# Altium PCB RV901-cnc.PcbDoc
Units mil, origin at the board's own origin, x right, y up, seen from the top; angles counter-clockwise.
Board outline 1795.28 x 2149.61 mil, 2 copper layers (Top Layer, Bottom Layer), stack 63.824 mil thick; 19 components, 84 nets, 151 pads, 0 vias.
Unrouted connection lines stored in the file: 23.
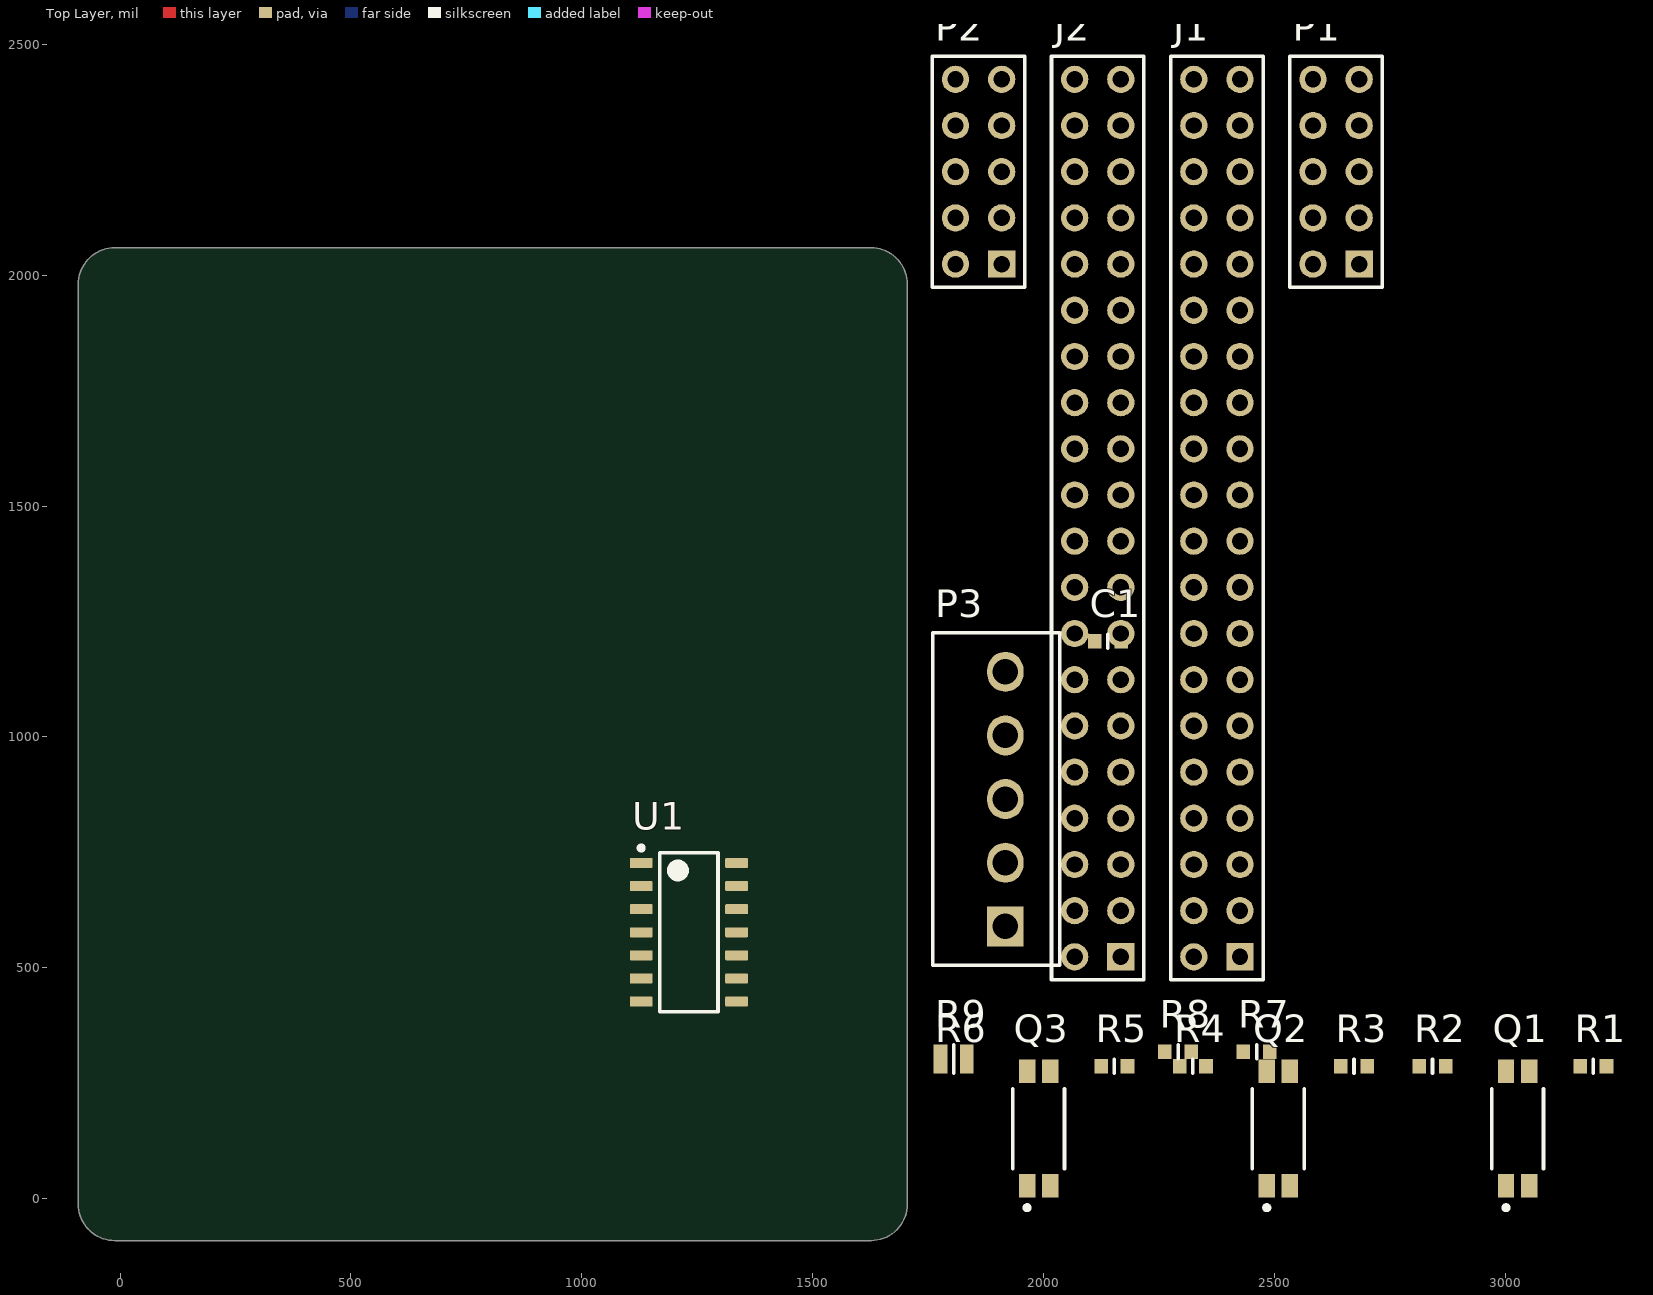
[diagram p0: Top Layer view]
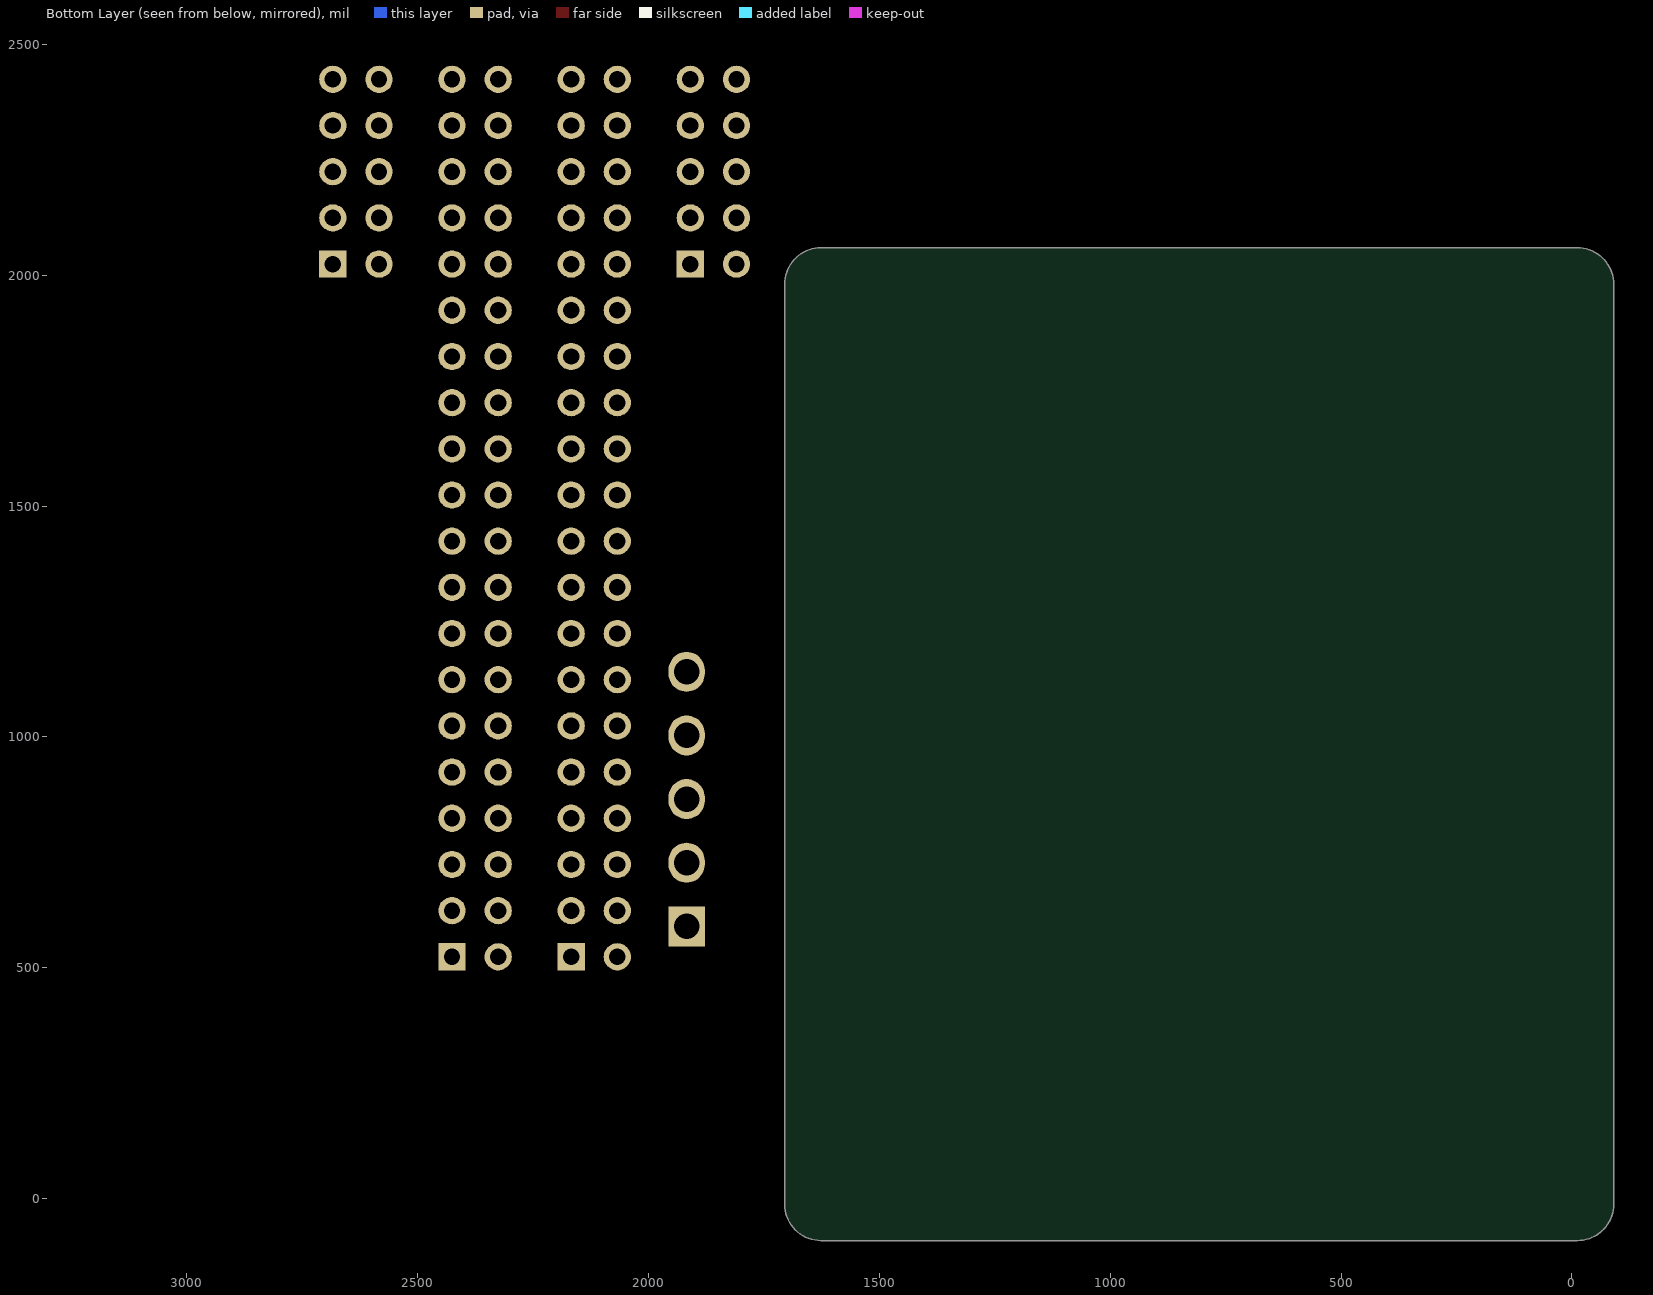
[diagram p1: Bottom Layer view, seen from below]

## Layer stack, top to bottom
Top Solder: solder mask 0.4, Solder Resist, Dk 3.5
Top Layer: signal copper 1.4
Dielectric 1: dielectric 61.0236, FR-4, Dk 4.8
Bottom Layer: signal copper 1.4
Bottom Solder: solder mask 0.4, Solder Resist, Dk 3.5

## Board outline
-90.55,-11.81 -90.55,1980.31 cw(c-11.81,1980.31) -11.81,2059.06 1625.98,2059.06 cw(c1625.98,1980.31) 1704.72,1980.31 1704.72,-11.81 cw(c1625.98,-11.81) 1625.98,-90.55 -11.81,-90.55 cw(c-11.81,-11.81)

## Design rules (kind name [scope] priority, off if disabled: settings)
BoardOutlineClearance [All] p1: gap=19.68 ignorepadtopadclearanceinfootprint=FALSE
Clearance Clearance_polygon [InPolygon] p1: gap=20 ignorepadtopadclearanceinfootprint=FALSE
Clearance [All] p2: gap=8 ignorepadtopadclearanceinfootprint=FALSE
ComponentClearance ComponentClearance_1 [HasFootprint('P_HEADER_1x8_2.54')] p1: gap=0 collisioncheckmode=3 verticalgap=0 showdistances=FALSE
ComponentClearance [All] p2: gap=10 collisioncheckmode=3 verticalgap=10 showdistances=FALSE
HoleSize [All] p1: absolutevalues=TRUE maxlimit=100 minlimit=11.81 maxpercent=80.000 minpercent=20.000
MinimumAnnularRing [All] p1: minimumring=8
MinimumSolderMaskSliver BQFN41 [HasFootprint('BQFN41_11x9')] p1: minsoldermaskwidth=0
MinimumSolderMaskSliver [All] p2: minsoldermaskwidth=1
PolygonConnect VIA [IsVia] p1: connectstyle=Direct reliefconductorwidth=10 reliefentries=4 polygonreliefangle="90 Angle" airgapwidth=10
PolygonConnect [All] p2: connectstyle=Relief reliefconductorwidth=30 reliefentries=4 polygonreliefangle="90 Angle" airgapwidth=15
RoutingVias [All] p1: holewidth=11.81 width=31.5 viastyle="Through Hole" minholewidth=11.81 minwidth=31.5 maxholewidth=11.81 maxwidth=31.5
SilkToSilkClearance [All] p1: silktosilkclearance=1
SilkToSolderMaskClearance [IsPad] p1: minsilkscreentomaskgap=1 clearancetoexposedcopper=TRUE
SolderMaskExpansion [All] p1: expansion=4 istentingtop=FALSE
SupplyNets "Schematic Supply Nets" [InNet('+12V')] p1: voltage=0.000
SupplyNets "Schematic Supply Nets_3" [InNet('GND')] p2: voltage=0.000
SupplyNets "Schematic Supply Nets_2" [InNet('+5V')] p3: voltage=0.000
SupplyNets "Schematic Supply Nets_1" [InNet('+3.3V')] p4: voltage=0.000
Width [All] p1: maxlimit=100 minlimit=7 preferedwidth=10 minimp=50.000000 maximp=50.000000 favimp=50.000000
25 further rules are at their usual default settings.

## Classes and differential pairs
component class AXIS: R7 R8 R9 U1
component class RV901-cnc: J1 J2 P1 P2
component class ENDSTOP: C1 P3 Q1 Q2 R1 R2 R3 R4 R5

## Components (designator, comment, footprint, x,y, rotation, side; value= is the part's Value field where it differs from the comment)
C1 "Ceramic X7R" C_0603_1608 2138.99,1206.84 r0 top value=100nF
J1 "Goldpin female straight" J_HEADER_2x20_2.54_VERTICAL 2374.99,1473.84 r90 top value=DS1023-2*20S01
J2 "Goldpin female straight" J_HEADER_2x20_2.54_VERTICAL 2116.99,1473.84 r90 top value=DS1023-2*20S01
P1 "Goldpin male" P_HEADER_2x5_2.54 2632.99,2223.84 r90 top value=DS1021-2*5SF11
P2 "Goldpin male" P_HEADER_2x5_2.54 1858.99,2223.84 r90 top value=DS1021-2*5SF11
P3 "5-pin 3.5mm terminal block" P_15EDGVC-3.5-05P 1916.99,589.84 r90 top value=15EDGVC-3.5-05P-14
Q1 "TCMT1106" FP-TCMT1106-MFG 3025.99,151.84 r90 top
Q2 "TCMT1106" FP-TCMT1106-MFG 2507.99,151.84 r90 top
Q3 "TCMT1106" FP-TCMT1106-MFG 1988.99,151.84 r90 top
R1 "Resistor" R_0603_1608 3189.99,286.84 r0 top value=10k
R2 "Resistor" R_0603_1608 2841.99,286.84 r0 top value=330R
R3 "Resistor" R_0603_1608 2671.99,286.84 r0 top value=10k
R4 "Resistor" R_0603_1608 2322.99,286.84 r0 top value=330R
R5 "Resistor" R_0603_1608 2152.99,286.84 r0 top value=10k
R6 "Resistor" R_0603_1608 1804.99,286.84 r0 top value=330R
R7 "Resistor" R_0603_1608 2460.99,317.84 r0 top value=0R
R8 "Resistor" R_0603_1608 2290.99,317.84 r0 top value=0R
R9 "Resistor" R_0603_1608 1804.99,317.84 r0 top value=0R
U1 "TL074ID" D0014A_L 1231.65,577 r0 top

## Footprints (in the part's own frame and the unit in brackets; to place one, negate y for a bottom-side part, rotate by r counter-clockwise, add the part's x,y. Pads: shape width x height; smd on the part's side, far side on the other; paste and mask are expansions set on the pad)
C_0603_1608 [mm]
  rect 0.75x0.8 smd: 1(-0.725,0) 2(0.725,0)
  silkscreen extent 0,-0.38 0,0.38, body extent -0.85,-0.45 0.85,0.45, height 0.89
D0014A_L [mm] "SOIC, 14-Leads, Body 8.75x4mm, Pitch 1.27mm, IPC High Density"
  rrect18% 1.25x0.55 smd: 1(-2.625,3.81) 2(-2.625,2.54) 3(-2.625,1.27) 4(-2.625,0) 5(-2.625,-1.27) 6(-2.625,-2.54) 7(-2.625,-3.81) 8(2.625,-3.81) 9(2.625,-2.54) 10(2.625,-1.27) 11(2.625,0) 12(2.625,1.27) 13(2.625,2.54) 14(2.625,3.81)
  silkscreen extent -2.75,-4.38 1.6,4.76, body extent -3.02,-4.32 3.02,4.32, height 1.59
FP-TCMT1106-MFG [mm]
  rect 1.3x0.9 smd paste+0 mask+0: 1(-3.15,0.635) 2(-3.15,-0.635) 3(3.15,-0.635) 4(3.15,0.635)
  silkscreen extent -4.47,-1.43 2.2,1.43, body extent -3.9,-1.53 3.9,1.53, height 0.25
J_HEADER_2x20_2.54_VERTICAL [mm] "Connector; Header; 40 Position; Female"
  rect 1.5x1.5 hole 0.9: 1(-24.13,-1.27)
  round 1.5 hole 0.9: 2(-24.13,1.27) 3(-21.59,-1.27) 4(-21.59,1.27) 5(-19.05,-1.27) 6(-19.05,1.27) 7(-16.51,-1.27) 8(-16.51,1.27) 9(-13.97,-1.27) 10(-13.97,1.27) 11(-11.43,-1.27) 12(-11.43,1.27) 13(-8.89,-1.27) 14(-8.89,1.27) 15(-6.35,-1.27) 16(-6.35,1.27) 17(-3.81,-1.27) 18(-3.81,1.27) 19(-1.27,-1.27) 20(-1.27,1.27) 21(1.27,-1.27) 22(1.27,1.27) 23(3.81,-1.27) 24(3.81,1.27) 25(6.35,-1.27) 26(6.35,1.27) 27(8.89,-1.27) 28(8.89,1.27) 29(11.43,-1.27) 30(11.43,1.27) 31(13.97,-1.27) 32(13.97,1.27) 33(16.51,-1.27) 34(16.51,1.27) 35(19.05,-1.27) 36(19.05,1.27) 37(21.59,-1.27) 38(21.59,1.27) 39(24.13,-1.27) 40(24.13,1.27)
  silkscreen extent -25.4,-2.54 25.4,2.54, body extent -25.4,-2.52 25.4,2.52, height 8.4
P_15EDGVC-3.5-05P [mm] "Connector; Terminal Block; 5 Position; Male; 3.5mm"
  rect 2.2x2 hole 1.4: 1(0,0)
  oval 2.2x2 hole 1.4: 2(3.5,0) 3(7,0) 4(10.5,0) 5(14,0)
  silkscreen extent -2.15,-3 16.15,4, body extent -2.15,-3 16.15,4, height 9.3
P_HEADER_2x5_2.54 [mm] "Connector; Header"
  rect 1.5x1.5 hole 0.9: 1(-5.08,-1.27)
  round 1.5 hole 0.9: 2(-5.08,1.27) 3(-2.54,-1.27) 4(-2.54,1.27) 5(0,-1.27) 6(0,1.27) 7(2.54,-1.27) 8(2.54,1.27) 9(5.08,-1.27) 10(5.08,1.27)
  silkscreen extent -6.35,-2.54 6.35,2.54, body extent -6.35,-2.5 6.35,2.5, height 8.4
R_0603_1608 [mm]
  rect 0.75x0.8 smd: 1(-0.725,0) 2(0.725,0)
  silkscreen extent 0,-0.38 0,0.38, body extent -0.87,-0.47 0.88,0.48, height 0.54

## Part data
C1: library part C_100nF_50V_X7R_0603_5, "Capacitor", Dielectric=X7R, Manufacturer=Samsung, Manufacturer Part Number=CL10B104JB8NNNC, Tolerance (%)=5, Voltage=50V, HelpURL=http://www.tme.eu/pl/Document/4a42202b32dab16128fe107dd69598cc/samsung-chip-cap.pdf, Part Number=C_100nF_50V_X7R_0603_5, SCH_Footprint=0603, Supplier 1=TME, Supplier 2="RS Components", Supplier 3=Farnell, Supplier 4=Mouser, Supplier 5=Digi-Key, Supplier 6=LCSC, Supplier Part Number 1=CL10B104JB8NNNC, Supplier Part Number 2=7665455, Supplier Part Number 5=1276-1033-1-ND, Supplier Part Number 6=C24452
J1 J2: library part J_HEADER_2x20_2.54_VERTICAL, "Pin Header", Manufacturer=Connfly, Manufacturer Part Number=DS1023-2*20S01, Supplier Part Number 1=ZL262-40DG, HelpURL=http://www.tme.eu/pl/Document/efd0203e2d3a140765df98191085ea88/DS1023.pdf, Part Number=J_HEADER_2x20_2.54_VERTICAL, SCH_Footprint="2x20 2.54mm Vertical", Supplier 1=TME, Supplier 2="RS Components", Supplier 3=Farnell, Supplier 4=Mouser, Supplier 5=Digi-Key, Supplier 6=LCSC
P1 P2: library part P_HEADER_2x5_2.54, "Pin Header", Manufacturer=Connfly, Manufacturer Part Number=DS1021-2*5SF11, Supplier Part Number 1=ZL202-10G, HelpURL=https://www.tme.eu/Document/cc301e58a5da78cb543a94b5a5b7f06a/DS1021.pdf, Part Number=P_HEADER_2x5_2.54, SCH_Footprint="2x5 2.54mm", Supplier 1=TME, Supplier 2="RS Components", Supplier 3=Farnell, Supplier 4=Mouser, Supplier 5=Digi-Key, Supplier 6=LCSC
P3: library part P_15EDGVC-3.5-05P-14, "Pin Header", Manufacturer="DEGSON ELECTRONICS", Manufacturer Part Number=15EDGVC-3.5-05P-14, HelpURL=https://www.tme.eu/Document/83e7173fe653a2d0e44585e87978945b/opr014R8.pdf, Part Number=P_15EDGVC-3.5-05P-14, SCH_Footprint=5x3.5mm, Supplier 1=TME, Supplier 2="RS Components", Supplier 3=Farnell, Supplier 4=Mouser, Supplier 5=Digi-Key, Supplier 6=LCSC, Supplier 7=Conrad, Supplier Part Number 6=C7603430, Supplier Part Number 7=1327356
Q1 Q2 Q3: library part CMP-00030-39642376-1, "TCMT1106 TCMT1106 Vishay Transistor Output Optocouplers Phototransistor Out 3750Vrms1 Channel 4-SOP RoHS", Ambient Temperature Range High=100°C, Case/Package=SOP, Collector Emitter Saturation Voltage=300mV, Collector Emitter Voltage (VCEO)=70V, Current Transfer Ratio=300%, Forward Current=60mA, Forward Voltage=1.35V, Input Current=50mA, Isolation Voltage=3.75kV, Max Junction Temperature (Tj)=125°C, Max Power Dissipation=250mW, Min Operating Temperature=-40°C, Reverse Breakdown Voltage=6V, Fall Time=4.7s, Height=2.3mm, Lead Free="Lead Free", Max Collector Current=50mA, Max Input Current=60mA, Max Operating Temperature=100°C, Max Output Voltage=70V, Mount="PCB, Surface Mount", NexarPartId=39642376, Number of Channels=1, Number of Elements=1, Number of Pins=4, Output Current per Channel=50mA, Output Voltage=70V, Packaging="Tape and Reel", Power Dissipation=250mW, Radiation Hardening=No, REACH SVHC=Unknown, Reverse Voltage=6V, Rise Time=3s, RoHS=Compliant, Schedule B="8541408000, 8541408000", Turn-Off Delay Time=8.5µs, Turn-On Delay Time=9.5µs, Voltage=6V, Voltage Rating (DC)=70V
R1 R3 R5: library part R_10k_0603_1_AECQ0, Manufacturer=Panasonic, Manufacturer Part Number=ERJ-3EKF1002V, Power=100mW, Supplier Part Number 1=ERJ3EKF1002V, Tolerance=1%, Voltage=75V, AEC-Q=0, HelpURL=https://industrial.panasonic.com/cdbs/www-data/pdf/RDA0000/AOA0000C304.pdf, Part Number=R_10k_0603_1_AECQ0, SCH_Footprint=0603, Supplier 1=TME, Supplier 2="RS Components", Supplier 3=Farnell, Supplier 4=Mouser, Supplier 5=Digi-Key, Supplier 6=LCSC, Supplier Part Number 3=2303192, Supplier Part Number 4=667-ERJ-3EKF1002V, Supplier Part Number 5=P10.0KHCT-ND, Supplier Part Number 6=C191124
R2 R4 R6: library part R_330R_0603_1, Manufacturer=Yageo, Manufacturer Part Number=RC0603FR-07330RL, Power=100mW, Supplier Part Number 1=RC0603FR-07330R, Tolerance=1%, Voltage=50V, HelpURL=http://datasheet.octopart.com/RC0603FR-07330RL-Yageo-datasheet-8328172.pdf, Part Number=R_330R_0603_1, SCH_Footprint=0603, Supplier 1=TME, Supplier 2="RS Components", Supplier 3=Farnell, Supplier 4=Mouser, Supplier 5=Digi-Key, Supplier 6=LCSC, Supplier Part Number 2=5046499, Supplier Part Number 3=9238425, Supplier Part Number 4=603-RC0603FR-07330RL, Supplier Part Number 5=311-330HRCT-ND
R7 R8 R9: library part R_0R_0603_1, Manufacturer=Yageo, Manufacturer Part Number=RC0603FR-070RL, Power=100mW, Tolerance=1%, Voltage=75V, HelpURL=https://datasheet.octopart.com/RC0603FR-070RL-Yageo-datasheet-8328172.pdf, Part Number=R_0R_0603_1, SCH_Footprint=0603, Supplier 1=TME, Supplier 2="RS Components", Supplier 3=Farnell, Supplier 4=Mouser, Supplier 5=Digi-Key, Supplier 6=LCSC, Supplier Part Number 1=RC0603FR-070RL, Supplier Part Number 3=2309106, Supplier Part Number 4=603-RC0603FR-070RL, Supplier Part Number 5=311-0.0HRCT-ND, Supplier Part Number 6=C100044
U1: library part CMP-0017-00057-2, "Quad Low-Noise JFET-Input General-Purpose Operational Amplifier, 7 to 36 V, -40 to 85 degC, 14-pin SOIC (D14), Green (RoHS & no Sb/Br)", Manufacturer="Texas Instruments", Rating=Military, Total Supply Voltage(Max)(+5V is 5, +/-5V is 10)=36, Total Supply Voltage(Min)(+5V is 5, +/-5V is 10)=7, CMRR(Min)(dB)=70, Code_JEDEC=MS-012, ComponentLink1Description="Manufacturer URL", ComponentLink1URL=http://www.ti.com/, ComponentLink2Description=Datasheet, ComponentLink2URL=http://www.ti.com/lit/ds/symlink/tl074.pdf, ComponentLink3Description="Package Specification", ComponentLink3URL=http://www.ti.com/lit/ml/mpds177g/mpds177g.pdf, DatasheetVersion=SLOS080J, Eco-Plan="Green (RoHS & no Sb/Br)", GBW(Typ)(MHz)=3, IIB(Max)(pA)=200, Iq per channel(Max)(mA)=2.5, Mounting Technology="Surface Mount", Number of Channels=4, Offset Drift(Typ)(uV/C)=18, PackageDescription="14-Pin Plastic Small Outline, Body 8.65 x 3.90 mm, Pitch 1.27 mm", PackageReference=D0014A, PackageVersion="4040047-5/M, 06/2011", PartNumber=TL074ID, Slew Rate(Typ)(V/us)=13, Sub Family="General Purpose Amplifier, High Supply Voltage Amplifier (>=30V)", Vio (25C)(Max)(mV)=10, Vn at 1kHz(Typ)(nV/rtHz)=18

## Nets (pads, with @x,y where several pads share a name; then routed paths per layer and width w, separated by ;. In a path a pad name is that pad's centre, name@x,y a point inside that pad or via, vN(x,y) a via of type N, cw(c..) or ccw(c..) an arc to the next point about the centre after c; other vN are vias at no path point)
+3.3V: R1.2 R3.2 R5.2
+5V: J1.2 J2.2 P1.9 P2.9
GND: J1.1 J1.3 J1.5 J2.1 J2.3 J2.5 P1.6 P1.8 P1.10 P2.6 P2.8 P2.10
IN1: P2.5
IN2: P2.3
IN3: P2.1
IN4: J2.39
IN5: J2.37
IN6: J2.35
IN7: J2.33
IN8: J2.31
IN9: J2.29
IN10: J2.27
IN11: J2.25
IN12: J2.23
IN13: J2.21
IN14: J2.19
IN15: J2.17
IN16: J2.15
IN17: J2.13
IN18: J2.11
IN19: J2.9
IN20: J2.7
IN21: J2.6
IN22: J2.8
IN23: J2.10
IN24: J2.12
IN25: J2.14
IN26: J2.16
IN27: J2.18
IN28: J2.20
IN29: J2.22
IN30: J2.24
IN31: J2.26
IN32: J2.28
IN33: J2.30
IN34: J2.32
IN35: J2.34
IN36: J2.36
IN37: J2.38
IN38: J2.40
IN39: P2.2
IN40: P2.4
NetC1_1: C1.1 Q1.4 R1.1
NetP3_1: P3.1 R2.1
NetP3_2: P3.2 R4.1
NetP3_3: P3.3 R6.1
NetQ2_4: Q2.4 R3.1
NetQ3_4: Q3.4 R5.1
NetR7_1: R7.1
NetR8_1: R8.1
NetR9_1: R9.1
OUT1: J1.8
OUT2: J1.10
OUT3: J1.12
OUT4: J1.14
OUT5: J1.16
OUT6: J1.18
OUT7: J1.20
OUT8: J1.22
OUT9: J1.24
OUT10: J1.26
OUT11: J1.28
OUT12: J1.30
OUT13: J1.32
OUT14: J1.34
OUT15: J1.36
OUT16: J1.38
OUT17: J1.37
OUT18: J1.35
OUT19: J1.33
OUT20: J1.31
OUT21: J1.29
OUT22: J1.27
OUT23: J1.25
OUT24: J1.23
OUT25: J1.21
OUT26: J1.19
OUT27: J1.17
OUT28: J1.15
OUT29: J1.13
OUT30: J1.11
OUT31: J1.9
OUT32: J1.7
pads on no net: C1.2 J1.4 J1.6 J1.39 J1.40 J2.4 P1.1 P1.2 P1.3 P1.4 P1.5 P1.7 P2.7 P3.4 P3.5 Q1.1 Q1.2 Q1.3 Q2.1 Q2.2 Q2.3 Q3.1 Q3.2 Q3.3 R2.2 R4.2 R6.2 R7.2 R8.2 R9.2 U1.1 U1.2 U1.3 U1.4 U1.5 U1.6 U1.7 U1.8 U1.9 U1.10 U1.11 U1.12 U1.13 U1.14